# Altium PCB POWER.PcbDoc
Units mil, origin at the board's own origin, x right, y up, seen from the top; angles counter-clockwise.
Board outline 1670 x 1390 mil, 2 copper layers (Top Layer, Bottom Layer); 27 components, 25 nets, 139 pads, 15 vias.
Unrouted connection lines stored in the file: 3.
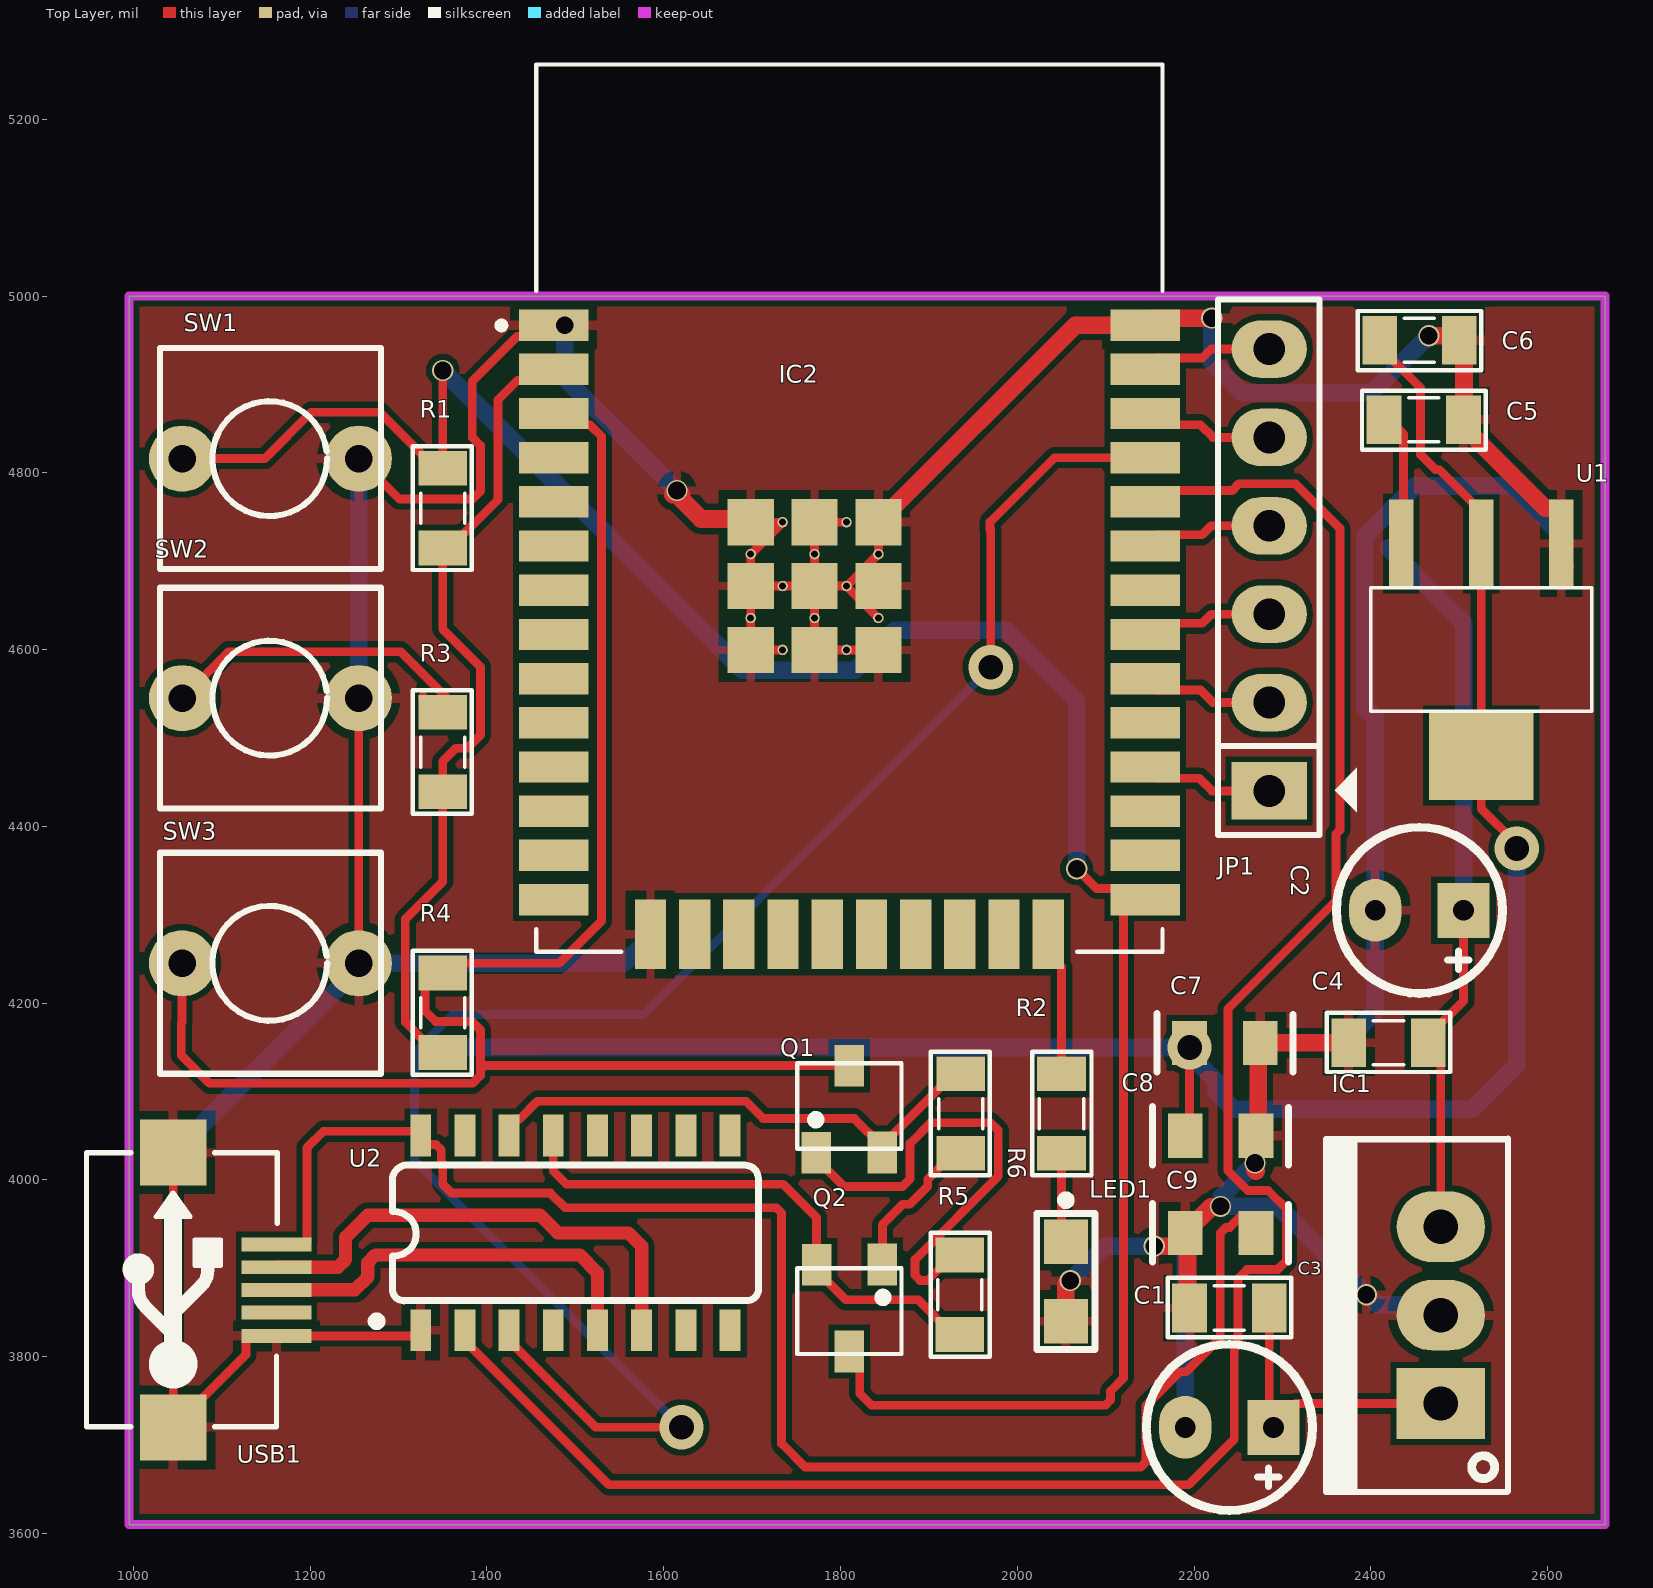
[diagram p0: Top Layer view]
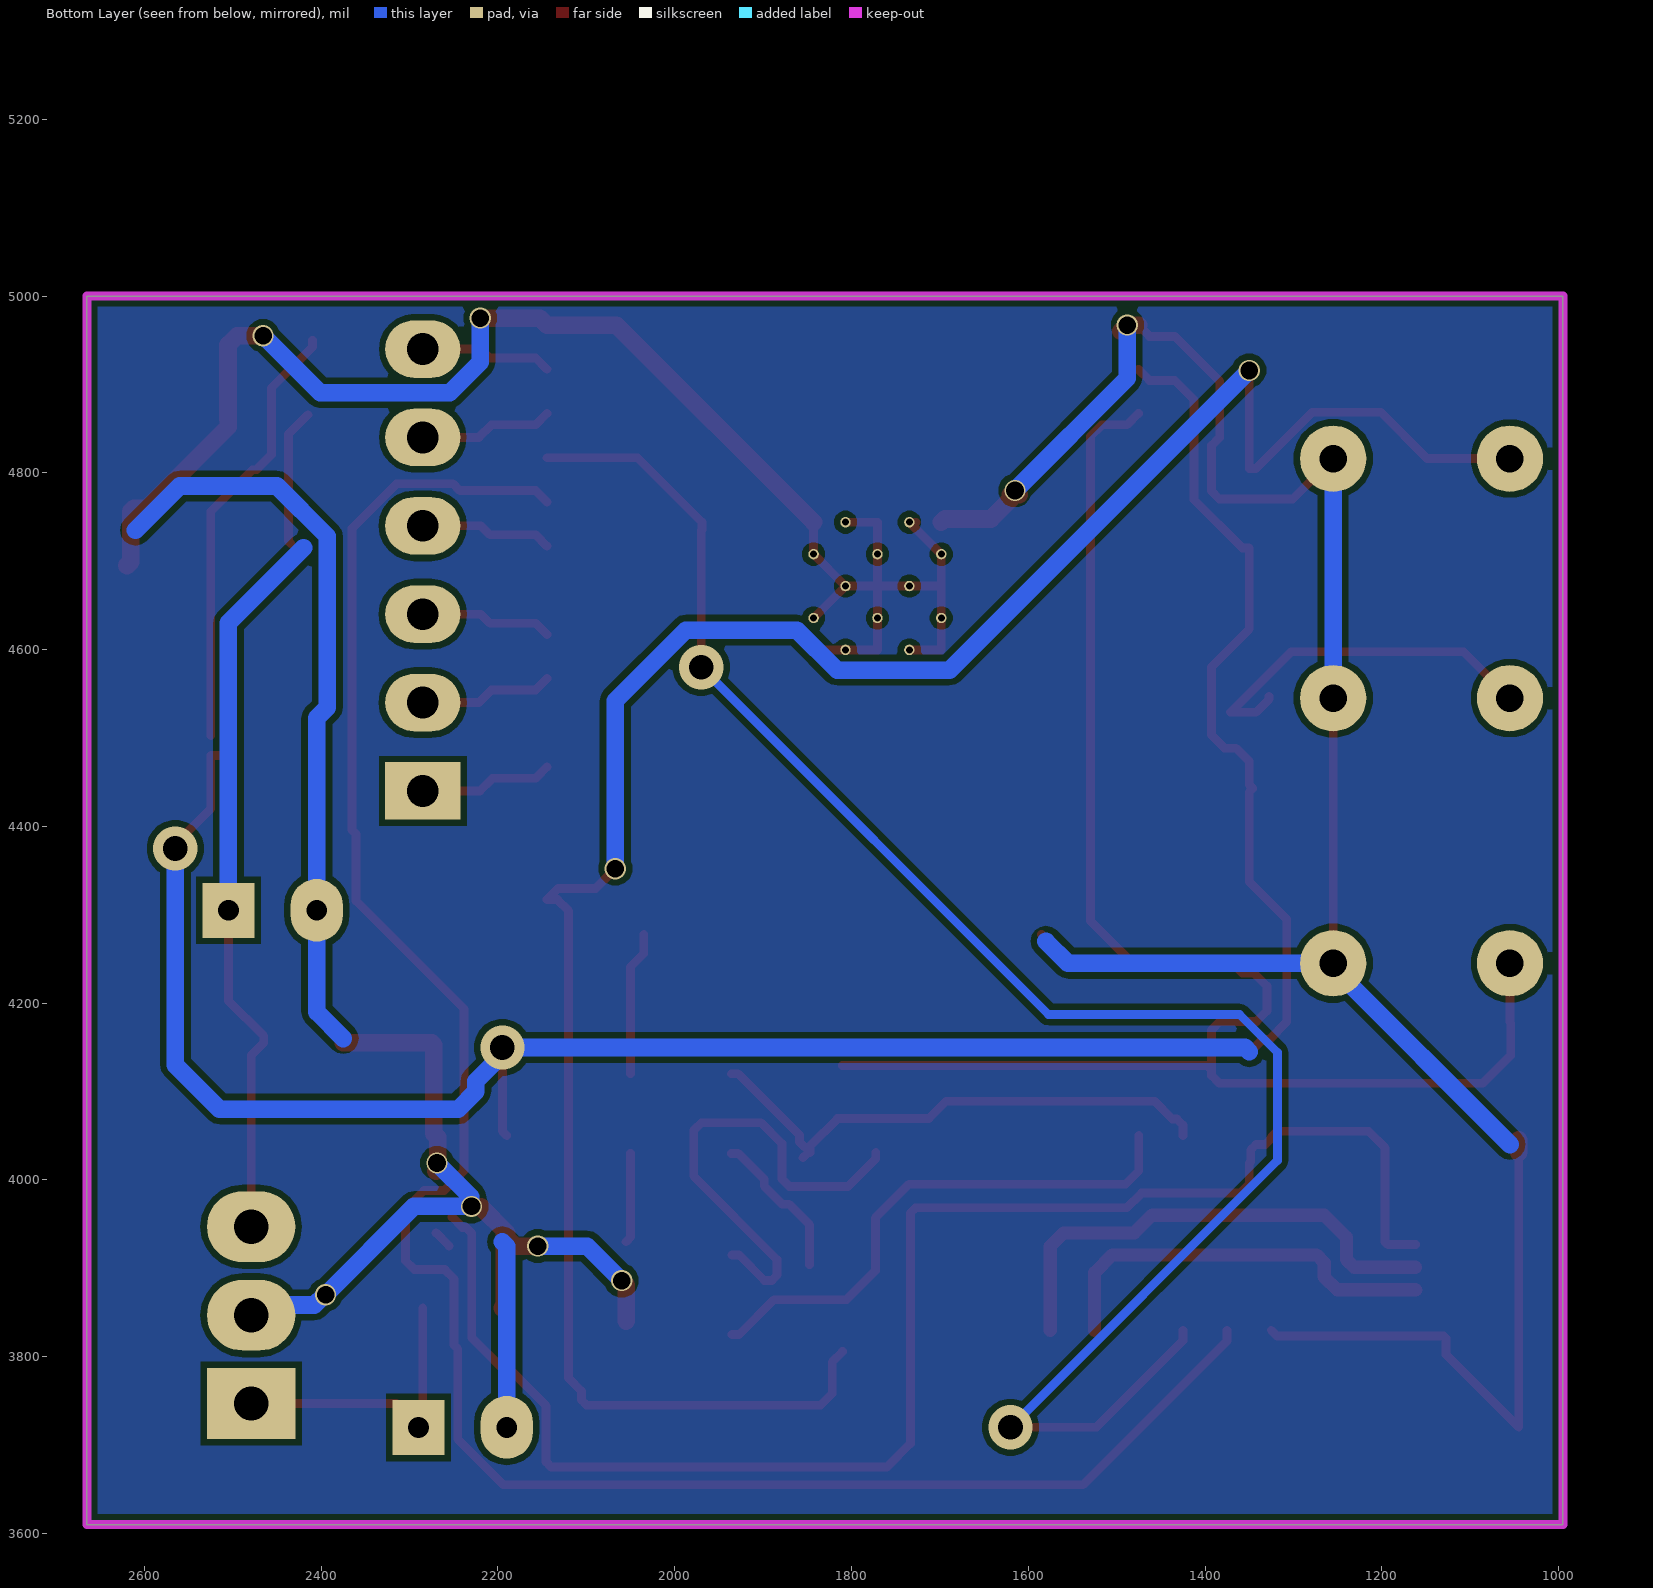
[diagram p1: Bottom Layer view, seen from below]
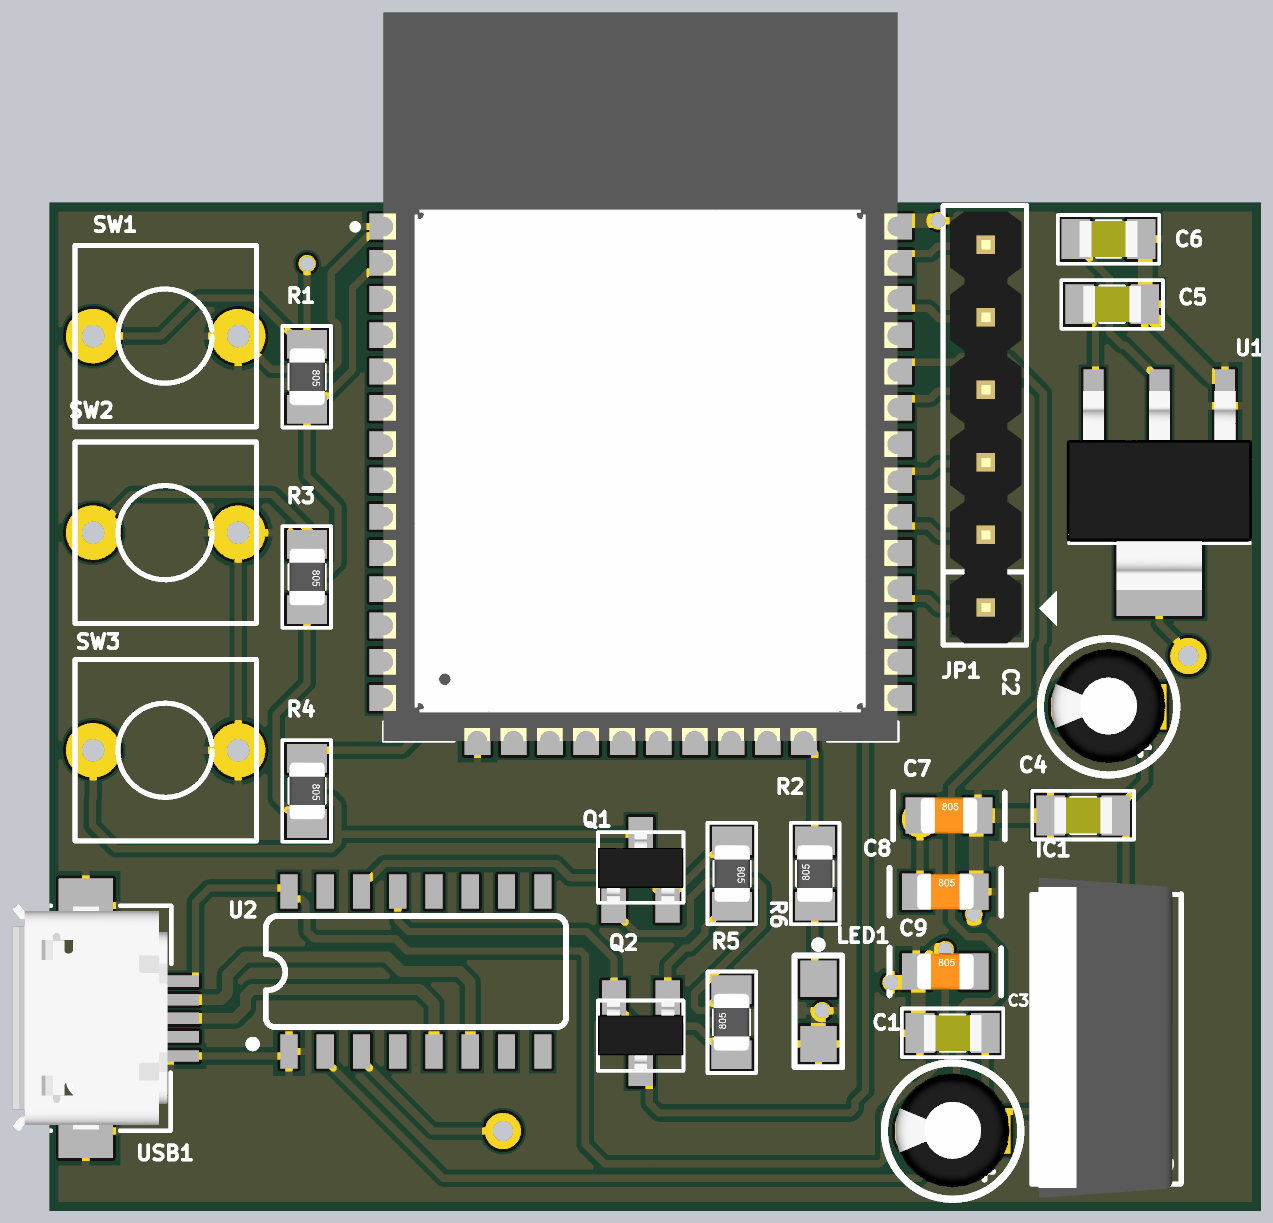
[diagram p2: 3D render of the assembled board from above, using the file's embedded part models]

## Layer stack, top to bottom
Top Solder: solder mask 0.4, Solder Resist, Dk 3.5
Top Layer: signal copper 1.4
Dielectric 1: dielectric 12.6, FR-4, Dk 4.8
Bottom Layer: signal copper 1.4
Bottom Solder: solder mask 0.4, Solder Resist, Dk 3.5

## Board outline
995,3610 2665,3610 2665,5000 995,5000

## Design rules (kind name [scope] priority, off if disabled: settings)
Clearance [All] p1: gap=7 ignorepadtopadclearanceinfootprint=FALSE
DiffPairsRouting [All] p1: maxlimit=10 minlimit=10 mostfreqgap=10 toplayer_minwidth=15 toplayer_maxwidth=15 toplayer_prefwidth=15 bottomlayer_minwidth=15 bottomlayer_maxwidth=15 bottomlayer_prefwidth=15 maxuncoupledlength=500
PolygonConnect [All] p1: connectstyle=Relief reliefconductorwidth=10 reliefentries=4 polygonreliefangle="90 Angle" airgapwidth=10
RoutingVias [All] p1: holewidth=20 width=24 viastyle="Through Hole" minholewidth=16 minwidth=24 maxholewidth=20 maxwidth=28
SolderMaskExpansion [All] p1: expansion=4 istentingtop=FALSE
Width [All] p1: maxlimit=40 minlimit=10 preferedwidth=20
29 further rules are at their usual default settings.

## Classes and differential pairs
differential pair class diff: D0
component class MCU: C7 C8 C9 IC2 JP1 LED1 Q1 Q2 R1 R2 R3 R4 R5 R6 SW1 SW2 SW3 U2 USB1
component class POWER: C1 C2 C3 C4 C5 C6 IC1 U1
differential pair D0: +D0_P -D0_N

## Components (designator, comment, footprint, x,y, rotation, side; value= is the part's Value field where it differs from the comment)
C1 "25V/10uF" C3MM 2240,3720 r180 top
C2 "10V/1uF" C3MM 2455,4305 r180 top
C3 "100nF" CAP_0805#1 2240,3855 r180 top value=33p
C4 "100nF" CAP_0805#2 2420,4155 r180 top value=33p
C5 "10uF" CAP_0805#1 2460,4860 r0 top value=33p
C6 "22uF" CAP_0805#1 2455,4950 r0 top value=33p
C7 "10uF" C0805 2235,4155 r0 top value=33p
C8 "10uF" C0805 2230,4050 r0 top value=33p
C9 "100nF" C0805 2230,3940 r0 top value=33p
IC1 "LM7805" QTO-220 2479.19,3746.94 r90 top
IC2 "ESP32-WROOM-32" MODULE_ESP32-WROOM-32 1810,4760 r0 top
JP1 "JP6 PIN" JP6 2285,4440 r90 top value=JP7
LED1 "LED" LED0805 2055,3885 r270 top value="LED 3 ly Single Colour"
Q1 "C1815" SOT23D 1810,4080 r0 top
Q2 "C1815" SOT23D 1810,3855 r180 top
R1 "10k" RES-SMD-0805 1350,4760 r270 top
R2 "Resistor - SMD" RES-SMD-0805 2050,4075 r90 top
R3 "10k" RES-SMD-0805 1350,4484 r270 top
R4 "10k" RES-SMD-0805 1350,4189 r270 top
R5 "10k" RES-SMD-0805 1935,3870 r90 top
R6 "10k" RES-SMD-0805 1936,4075 r270 top
SW1 "SW" SW2 1055,4816 r0 top value="SW chip 2 pin"
SW2 "SW" SW2 1055,4545 r0 top value="SW chip 2 pin"
SW3 "SW" SW2 1055,4245 r0 top value="SW chip 2 pin"
U1 "LM1117-ADJ" LM1117-SOP 2525,4670 r180 top
U2 "CH340C" SOP-16 1500,3940 r0 top
USB1 "USB" USB-M1 1161.84,3875.51 r90 top

## Footprints (in the part's own frame and the unit in brackets; to place one, negate y for a bottom-side part, rotate by r counter-clockwise, add the part's x,y. Pads: shape width x height; smd on the part's side, far side on the other; paste and mask are expansions set on the pad)
C3MM [mm]
  rect 1.5x1.58 hole 0.6: 1(-1.27,0)
  oval 1.5x1.8 hole 0.6: 2(1.27,0)
  silkscreen extent -2.39,-2.39 2.39,2.39, body extent -2,-2.03 1.99,1.97, height 7.01
C0805 [mil] "Chip Resistor; Body 2.0 x 1.3 mm (LxW typ)"
  rect 39.37x50 smd: 1(-40,0) 2(40,0)
  silkscreen extent -77,-33 77,33, body extent -39,-25 39,25, height 31
CAP_0805#1 [mil]
  rect 39.37x55 smd: 1(-45,0) 2(45,0)
  silkscreen extent -70,-34 70,33, body extent -40,-25 40,25, height 24
CAP_0805#2 [mil]
  rect 39.37x55 smd: 2(45,0) "  "(-45,0)
  silkscreen extent -70,-34 70,33, body extent -40,-25 40,25, height 24
JP6 [mil] "JP6"
  rect 65x85 hole 36: 1(0,0)
  oval 65x85 hole 36: 2(100,0) 3(200,0) 4(300,0) 5(400,0) 6(500,0)
  silkscreen extent -50,-99 556,58, body extent -48,-50 548,48, height 323
LED0805 [mil] "Chip Resistor; Body 2.0 x 1.3 mm (LxW typ)"
  rect 50x50 smd: 1(-45,0) 2(45,0)
  silkscreen extent -97,-33 77,33, body extent -60,-25 60,25, height 47
LM1117-SOP [mm]
  rect 0.7x2.54 smd: 1(-2.3,-1.27) 2(0,-1.27) 3(2.3,-1.27)
  rect 3x2.54 smd: 2(0,4.826)
  silkscreen extent -3.18,0 3.17,3.56, body extent -3.25,-1.78 3.25,5.18, height 1.68
MODULE_ESP32-WROOM-32 [mm]
  rect 2x0.9 smd: 1(-8.5,5.26) 3(-8.5,2.72) 4(-8.5,1.45) 5(-8.5,0.18) 6(-8.5,-1.09) 7(-8.5,-2.36) 8(-8.5,-3.63) 9(-8.5,-4.9) 10(-8.5,-6.17) 11(-8.5,-7.44) 12(-8.5,-8.71) 13(-8.5,-9.98) 14(-8.5,-11.25) 25(8.5,-11.25) 26(8.5,-9.98) 27(8.5,-8.71) 28(8.5,-7.44) 29(8.5,-6.17) 30(8.5,-4.9) 31(8.5,-3.63) 32(8.5,-2.36) 33(8.5,-1.09) 34(8.5,0.18) 35(8.5,1.45) 36(8.5,2.72) 37(8.5,3.99) 38(8.5,5.26) "                                                                                                                                         "(-8.5,3.99)
  rect 0.9x2 smd: 15(-5.715,-12.25) 16(-4.445,-12.25) 17(-3.175,-12.25) 18(-1.905,-12.25) 19(-0.635,-12.25) 20(0.635,-12.25) 21(1.905,-12.25) 22(3.175,-12.25) 23(4.445,-12.25) 24(5.715,-12.25)
  rect 1.33x1.33 smd: 39_1(-2.835,-0.405) 39_2(-1,-0.405) 39_3(0.835,-0.405) 39_4(-2.835,-2.24) 39_5(-1,-2.24) 39_6(0.835,-2.24) 39_7(-2.835,-4.075) 39_8(-1,-4.075) 39_9(0.835,-4.075)
  round 0.3 hole 0.2: 39_10(-1.917,-0.405) 39_11(-0.082,-0.405) 39_12(-2.835,-1.323) 39_13(-1,-1.323) 39_14(0.835,-1.323) 39_15(-1.917,-2.24) 39_16(-0.082,-2.24) 39_17(-2.835,-3.158) 39_18(-1,-3.158) 39_19(0.835,-3.158) 39_20(-1.917,-4.075) 39_21(-0.082,-4.075)
  silkscreen extent -10.1,-12.75 9,12.75, body extent -9.02,-12.75 8.98,12.75, height 3.2
QTO-220 [mil] "TO-220 - 1-2-3"
  rect 80x100 hole 39: 1(0,0)
  oval 80x100 hole 39: 2(100,0) 3(200,0)
  silkscreen extent -100,-76 300,130, body extent -119,-64 322,121, height 755
RES-SMD-0805 [mil]
  rect 39.37x55 smd: 1(-45,0) 2(45,0)
  silkscreen extent -70,-34 70,33, body extent -39,-25 39,25, height 31
SOP-16 [mm]
  rect 0.6x1.2 smd: 1(-4.445,-2.8) 2(-3.175,-2.8) 3(-1.905,-2.8) 4(-0.635,-2.8) 5(0.635,-2.8) 6(1.905,-2.8) 7(3.175,-2.8) 8(4.445,-2.8) 9(4.445,2.8) 10(3.175,2.8) 11(1.905,2.8) 12(0.635,2.8) 13(-0.635,2.8) 14(-1.905,2.8) 15(-3.175,2.8) 16(-4.445,2.8)
  silkscreen extent -5.84,-2.67 5.26,1.95, body extent -4.95,-3.47 4.95,3.47, height 1.75
SOT23D [mm] "SOT 23C - 1-3-2 - BCE"
  rect 0.85x1.2 smd: 1(-0.95,-1.25) 2(0.94,-1.245) 3(0,1.25)
  silkscreen extent -1.5,-1.14 1.5,1.32, body extent -1.5,-1.17 1.5,1.33, height 1.06
SW2 [mil] "SW button 2pin, 250x 250 mil"
  round 75 hole 31: 1(0,0) 2(200,0)
  silkscreen extent -25,-125 225,125
USB-M1 [mm]
  rect 0.4x2 smd: 1(1.3,0) 2(0.65,0) 3(0,0) 4(-0.65,0) 5(-1.321,0)
  rect 1.9x1.9 smd: 5(-3.95,2.968) 5(3.95,2.968)
  silkscreen extent -3.94,-0.03 3.94,5.46, body extent -3.98,0.11 4,5.54, height 2.71

## Part data
C1 C2: library part "Cap Pol", "Polarized Capacitor (Axial)", LatestRevisionDate=17-Jul-2002, LatestRevisionNote="Re-released for DXP Platform.", PackageReference=POLAR0.8, Published=8-Jun-2000, Publisher="Altium Limited"
C3 C4 C5 C6 C7 C8 C9: library part CapSMD, "Capacitor", LatestRevisionDate=17-Jul-2002, LatestRevisionNote="Re-released for DXP Platform.", PackageReference=RAD-0.3, Published=8-Jun-2000, Publisher="Altium Limited"
IC1: library part LM78xx, "On ap +, from + 5 to + 24VDC"
IC2: "Bluetooth, WiFi Transceiver Module 2.4GHz ~ 2.5GHz Surface Mount", Package="Module Espressif Systems", Digi-Key_Part_Number=1904-1010-1-ND, Digi-Key_Purchase_URL=https://www.digikey.com/product-detail/en/espressif-systems/ESP32-WROOM-32/1904-1010-1-ND/8544305?utm_source=snapeda&utm_medium=aggregator&utm_campaign=symbol, MF="Espressif Systems", MP=ESP32-WROOM-32, SnapEDA_Link=https://www.snapeda.com/parts/ESP32-WROOM-32/Espressif%20Systems/view-part/2753322/?ref=snap
JP1: library part JP6
LED1: "LED Single colour Green and Red"
Q1 Q2: library part 2SC1815, "NPN 600mW, ECB"
R1 R3 R4 R5 R6: library part "Resistor - SMD", "Resistor", Manufacturer="Generic Components", Class=Passive, Published=08/06/2000, Publisher="Altium Hobart Technology Centre"
R2: "Resistor SMD", Manufacturer="Generic Components", Class=Passive, Published=08/06/2000, Publisher="Altium Hobart Technology Centre"
SW1 SW2 SW3: library part SW2, "Switch button 2 pin"
U1: "800mA Low-Dropout Linear Regulator", Creator="Nguyen Ba Bien", Website=http://group3i.net
U2: "USB to serial chip CH340", Package=Package, Availability=Unavailable, Check_prices=https://www.snapeda.com/parts/CH340C/WCH/view-part/5428851/?ref=eda, MF=WCH, MP=CH340C, Price=None, SnapEDA_Link=https://www.snapeda.com/parts/CH340C/WCH/view-part/5428851/?ref=snap
USB1: library part USB-M

## Via types
v1: diameter 24, hole 20, Top Layer to Bottom Layer, 11 vias
v2: diameter 50, hole 28, Top Layer to Bottom Layer, 4 vias

## Nets (pads, with @x,y where several pads share a name; then routed paths per layer and width w, separated by ;. In a path a pad name is that pad's centre, name@x,y a point inside that pad or via, vN(x,y) a via of type N, cw(c..) or ccw(c..) an arc to the next point about the centre after c; other vN are vias at no path point)
3V3: "IC2.                                                                                                                                         " C6.1 C7.1 C8.1 R1.2 R3.2 R4.2 U1.2 | length 3179.6
  Top Layer w10: R3.2@1346.09,4442.91 1350,4446.82 1350,4473.69 1364.71,4488.4 1377.79,4488.4 1392.5,4503.1 1392.5,4580.46 1350,4622.96 R1.2 1357.81,4715 1412.5,4769.69 1412.5,4882.53 1434.34,4904.37 1462.64,4904.37 1475.35,4917.09 ; R4.2 1335.31,4158.69 1327.5,4158.69 1307.5,4178.69 1307.5,4294.96 1350,4337.46 R3.2 ; C8.1 2195,4055 v2(2195,4149.69) ; C6.1 2410,4942.19 2456.31,4895.87 2456.31,4820.49 2473.3,4803.5 2477.72,4803.5 2525,4756.22 2525,4720 U1.2@2525,4502.55 ; U1.2@2515.94,4480 2525,4480 2525,4420 2565,4380 v2(2565,4375)
  Bottom Layer w20: 1350,4145 1354.69,4149.69 v2(2195,4149.69) 2195,4141.57 2225,4111.57 2225,4100 2245,4080 2515,4080 2565,4130 v2(2565,4375)
5V: "C4.  " C2.1 C5.1 IC1.3 U1.3 | length 991.6
  Top Layer w10: C5.1@2415,4865.58 2437.13,4843.45 2437.13,4722.68 U1.3 ; IC1.3 2479.19,4140.81 2465,4155 2465,4162.81 2505,4202.81 C2.1
  Top Layer w20: IC1.3 IC1.3@2489.19,3946.94
  Bottom Layer w20: 2420,4715 2505,4630 C2.1
12V: C1.1 C3.1 IC1.1 | length 338.3
  Top Layer w10: C3.1 2285,3725 C1.1 2290,3721.57 2315.37,3746.94 IC1.1
D0_N: U2.5 USB1.3 | length 462.8
  Top Layer w15: USB1.3@1161.63,3875.3 USB1.3 1250.51,3875.51 1265,3890 1265,3906.21 1273.79,3915 1505,3915 1525,3895 U2.5
D0_P: U2.6 USB1.2 | length 562
  Top Layer w15: USB1.2 1231.21,3901.1 1240,3909.89 1240,3935 1265,3960 1460,3960 1480,3940 1560,3940 1575,3925 U2.6
DTR: Q2.2 R5.1 U2.13 | length 611.9
  Top Layer w10: U2.13 1475,4010 1490,3995 1735,3995 1773,3957 1773,3897.11 1805.7,3864.41 1887.77,3864.41 1927.19,3825 R5.1
EN: IC2.3 Q1.3 R4.1 SW3.1 | length 1873.8
  Top Layer w10: SW3.1 1055,4178.34 1054.14,4177.49 1054.14,4140.86 1085.68,4109.32 1383.71,4109.32 1392.5,4118.1 1392.5,4124.22 ; IC2.3 1488.07,4854.37 1516.37,4854.37 1529.72,4841.02 1529.72,4293.16 1481.57,4245 1368.81,4245 1357.81,4234 1344.69,4234 1330,4219.32 1330,4191.03 1341.72,4179.32 1383.08,4179.32 1392.5,4169.9 1392.5,4129.21 1392.5,4124.22 ; Q1.3 1462.6,4129.21 1397.5,4129.21 1392.5,4124.22
GND: C1.2 C2.2 C3.2 C4.2 C5.2 C6.2 C7.2 C8.2 C9.1 IC1.2 IC2.1 IC2.15 IC2.38 IC2.39_1 IC2.39_2 IC2.39_3 IC2.39_4 IC2.39_5 IC2.39_6 IC2.39_7 IC2.39_8 IC2.39_9 IC2.39_10 IC2.39_11 IC2.39_12 IC2.39_13 IC2.39_14 IC2.39_15 IC2.39_16 IC2.39_17 IC2.39_18 IC2.39_19 IC2.39_20 IC2.39_21 LED1.2 SW1.2 SW2.2 SW3.2 U1.1 U2.1 USB1.5 | length 6565.1
  Top Layer w10: USB1.5@1045,4031.02 1045,3720 1127.47,3802.47 1127.47,3820.64 1130.35,3823.51 1161.84,3823.51 1318.75,3823.51 U2.1 ; SW2.2@1247.5,4537.5 SW2.2 SW3.2 1265,4235 SW3.2@1265,4230 ; SW1.2 1300.68,4770.32 1383.71,4770.32 1392.5,4779.1 1392.5,4830.9 1383.42,4839.98 1383.42,4903.45 1434.34,4954.37 1462.64,4954.37 IC2.1 ; IC2.15@1575.97,4268.69 IC2.15 ; 1726.69,4744.05 IC2.39_10 IC2.39_12 IC2.39_4 ; IC2.39_20 IC2.39_7 IC2.39_17 IC2.39_4 ; IC2.39_11 IC2.39_2 IC2.39_13 IC2.39_5 ; IC2.39_9 IC2.39_21 IC2.39_8 IC2.39_18 IC2.39_5 ; IC2.39_19 IC2.39_16 ; IC2.39_3 IC2.39_14 IC2.39_16 ; C2.2 C2.2@2405.67,4305.67 ; IC1.2@2469.19,3846.94 IC1.2 ; IC2.39_4 IC2.39_15 IC2.39_5 ; IC2.39_5 IC2.39_16
  Top Layer w20: USB1.5@1045,4031.02 USB1.5@1045,4045 ; IC2.1 v1(1487.91,4967.09) IC2.1@1495,4960 ; v1@1610,4775 v1(1615,4780) 1620,4775 1620,4770 1642.21,4747.79 1694.65,4747.79 IC2.39_1 ; IC2.39_3 2065.91,4967.09 IC2.38 2152.36,4974.8 2209.8,4974.8 2210,4975 v1(2220,4975) ; LED1.2 2055,3881 v1(2060,3886) ; v1(2155,3925) 2180.31,3925 2190,3934.69 C9.1 ; C3.2 2192.5,3857.5 2192.5,3937.5 C9.1 ; v1(2230,3970) 2229.23,3969.23 2219.23,3969.23 C9.1 ; v1@2270,4010 2269.04,4010.96 v1(2269.04,4019) 2268.21,4019.83 2268.21,4048.21 C8.2 2272.5,4052.5 2272.5,4152.5 C7.2 C4.2 ; v1@2465,4955 v1(2465.68,4955) 2495,4955 C6.2 2505.5,4944.5 2505.5,4860.5 C5.2 2505,4852.19 2597.19,4760 2611.77,4760 2615.55,4756.22 U1.1 2615.55,4698.78 2619.33,4695 U1.1@2620,4695
  Bottom Layer w20: 1055,4040 1255,4240 SW3.2 1555,4245 1580,4270 ; SW2.2 SW1.2 ; v1(1487.91,4967.09) 1487.91,4907.09 v1(1615,4780) ; v1(2060,3886) 2099,3925 v1(2155,3925) ; C1.2 2190,3925 2195,3930 ; v1(2220,4975) 2220,4925 2254.5,4890.5 2401.18,4890.5 v1(2465.68,4955) ; v1(2269.04,4019) 2230.77,3980.72 2230.77,3970.77 v1(2230,3970) 2295,3970 v1(2395,3870) 2396.08,3870 2407.66,3858.42 2467.71,3858.42 IC1.2 ; 2375,4160 2405,4190 C2.2 2405,4522.47 2393,4534.47 2393,4728 2450,4785 2560,4785 2610,4735
IO_0: IC2.25 Q2.3 R1.1 SW1.1 | length 2594.6
  Top Layer w10: SW1.1@1054.31,4805 SW1.1@1070,4805 ; SW1.1 1148.42,4816 1200.92,4868.5 1278.69,4868.5 1342.19,4805 R1.1 v1(1350,4915.79) ; Q2.3 1821.73,3794.06 1821.73,3758.27 1835,3745 2099.61,3745 2105.47,3750.86 2105.47,3760.92 2120,3775.45 2120,4304.37 2132.72,4317.09 IC2.25 2131.93,4329.8 2089.5,4329.8 v1(2067.21,4352.09)
  Bottom Layer w20: v1(1350,4915.79) 1689.13,4576.66 1816.24,4576.66 1861.58,4622 1987.4,4622 2067.21,4542.18 v1(2067.21,4352.09)
IO_2: IC2.24 R2.2 | length 163.9
  Top Layer w10: IC2.24 2035,4256.06 2050,4241.06 R2.2
IO_16: R3.1 SW2.1 | length 418.8
  Top Layer w10: SW2.1 1107.5,4597.5 1302.5,4597.5 1371,4529 R3.1 1342.19,4529 1327.5,4543.69 R3.1@1327.5,4546.75
NetIC2_28: IC2.28 JP1.1 | length 151.6
  Top Layer w10: IC2.28 2157.36,4454.37 2206.07,4454.37 2220.44,4440 JP1.1
NetIC2_30: IC2.30 JP1.2 | length 151.6
  Top Layer w10: IC2.30 2157.36,4554.37 2207.12,4554.37 2221.49,4540 JP1.2
NetIC2_31: IC2.31 JP1.3 | length 149.8
  Top Layer w10: IC2.31 2157.36,4629.8 2209.21,4629.8 2219.4,4640 JP1.3
NetIC2_33: IC2.33 JP1.4 | length 149.8
  Top Layer w10: IC2.33 2157.36,4729.8 2209.21,4729.8 2219.4,4740 JP1.4
NetIC2_36: IC2.36 JP1.5 | length 151.6
  Top Layer w10: IC2.36 2157.36,4854.37 2207.12,4854.37 2221.49,4840 JP1.5
NetIC2_37: IC2.37 JP1.6 | length 149.8
  Top Layer w10: IC2.37 2157.36,4929.8 2209.21,4929.8 2219.4,4940 JP1.6
NetLED1_1: LED1.1 R2.1 | length 102.1
  Top Layer w10: R2.1 2050,3935 LED1.1
NetQ1_1: Q1.1 R5.2 | length 550.9
  Top Layer w10: Q1.1 1772.6,4023.9 1804.12,3992.38 1869.95,3992.38 1878.73,4001.16 1878.73,4041.13 1902.29,4064.69 1969.71,4064.69 1978.5,4055.9 1978.5,4004.1 1884.22,3909.82 1884.22,3892.03 1890.07,3886.17 1898.36,3886.17 1927.19,3915 R5.2
NetQ2_1: Q2.1 R6.2 | length 171.6
  Top Layer w10: Q2.1 1847.4,3949.22 1870.56,3972.38 1878.23,3972.38 1898.73,3992.88 1898.73,4000.55 1928.19,4030 R6.2
RST: Q1.2 R6.1 U2.14 | length 610.4
  Top Layer w10: U2.14 1425,4062.05 1431.81,4068.86 1436.98,4068.86 1456.98,4088.86 1693.02,4088.86 1712.47,4069.41 1808.59,4069.41 1808.76,4069.24 1815.65,4069.24 1847,4037.89 Q1.2 1849,4031 Q1.2@1855,4025 ; Q1.2@1848.02,4036.87 1852.87,4036.87 1858.73,4042.73 1858.73,4050.55 1928.19,4120 R6.1
RX: IC2.35 U2.3 | length 1999.4
  Top Layer w10: U2.3 1425,3817.95 1522.95,3720 v2(1620,3720) ; v2(1970,4580) 1970,4735 1969.14,4735.86 1969.14,4744.14 2042.09,4817.09 IC2.35
  Bottom Layer w10: v2(1620,3720) 1318,4022 1318,4144.11 1360.94,4187.06 1577.06,4187.06 v2(1970,4580)
TX: IC2.34 U2.2 | length 2389.3
  Top Layer w10: U2.2 1375,3817.95 1537.95,3655 2193.88,3655 2245.47,3706.6 2245.47,3808.79 2249.69,3813 2249.69,3888.08 2260.04,3898.44 2294.33,3898.44 2304.69,3908.79 2304.69,3966.97 2283.66,3988 2260.89,3988 2238.31,4010.57 2238.31,4193.31 2360.47,4315.47 2360.47,4390.98 2365,4395.5 2365,4737.18 2314.68,4787.5 2250.69,4787.5 2243,4779.8 2157.36,4779.8 IC2.34
V3: U2.4
VCC: C9.2 U2.16 USB1.1 | length 1783.2
  Top Layer w10: USB1.1 1193.34,3926.69 1196.21,3929.57 1196.21,4036.21 1215,4055 1318.19,4055 1325,4048.19 1325,4046.81 1331.81,4040 1342.33,4040 1348.19,4034.14 1348.19,4020.4 1350,4018.59 1350,3995 1360,3985 1471.72,3985 1488.36,3968.36 1727.5,3968.36 1733.36,3962.5 1733.36,3701.64 1760,3675 2139.61,3675 2145.47,3680.86 2145.47,3744.35 2183.94,3782.82 2191.22,3782.82 2229.69,3821.29 2229.69,3939.69 2236,3946 2239.94,3946 C9.2@2251.97,3958.03 ; C9.2@2255.31,3925.31 C9.2
pads on no net: IC2.4 IC2.5 IC2.6 IC2.7 IC2.8 IC2.9 IC2.10 IC2.11 IC2.12 IC2.13 IC2.14 IC2.16 IC2.17 IC2.18 IC2.19 IC2.20 IC2.21 IC2.22 IC2.23 IC2.26 IC2.27 IC2.29 IC2.32 U2.7 U2.8 U2.9 U2.10 U2.11 U2.12 U2.15 USB1.4

## Polygon pours and split planes (outlines as drawn)
GND on Top Layer "GND_L01_P000" (solid, pour order 0): 2670,4915 2670,4990 2660,5000 2665,5000 2665,3610 995,3610 995,5000 2665,5000
no net on Bottom Layer "NONET_L02_P002" (solid, pour order 2): 2665,5000 2665,3610 995,3610 995,5000

## Keep-outs
Keep-Out Layer:
  lines w10: 995,3610 995,5000 1570,5000 2665,5000 2665,3610 995,3610

## Silkscreen, mask and mechanical layers (free items; w line width, h text height)
Top Overlay:

## Text inside footprints (layer, text, board x,y; h text height)
IC2: Mechanical 13 "ANTENNA" at 1573.78,5114.33 h30